# Altium PCB PCB1.PcbDoc (part 1 of 2)
Units mil, origin at the board's own origin, x right, y up, seen from the top; angles counter-clockwise.
Board outline 3553.34 x 3553.34 mil, 2 copper layers (Top Layer, Bottom Layer); 128 components, 103 nets, 393 pads, 82 vias.
Unrouted connection lines stored in the file: 8.
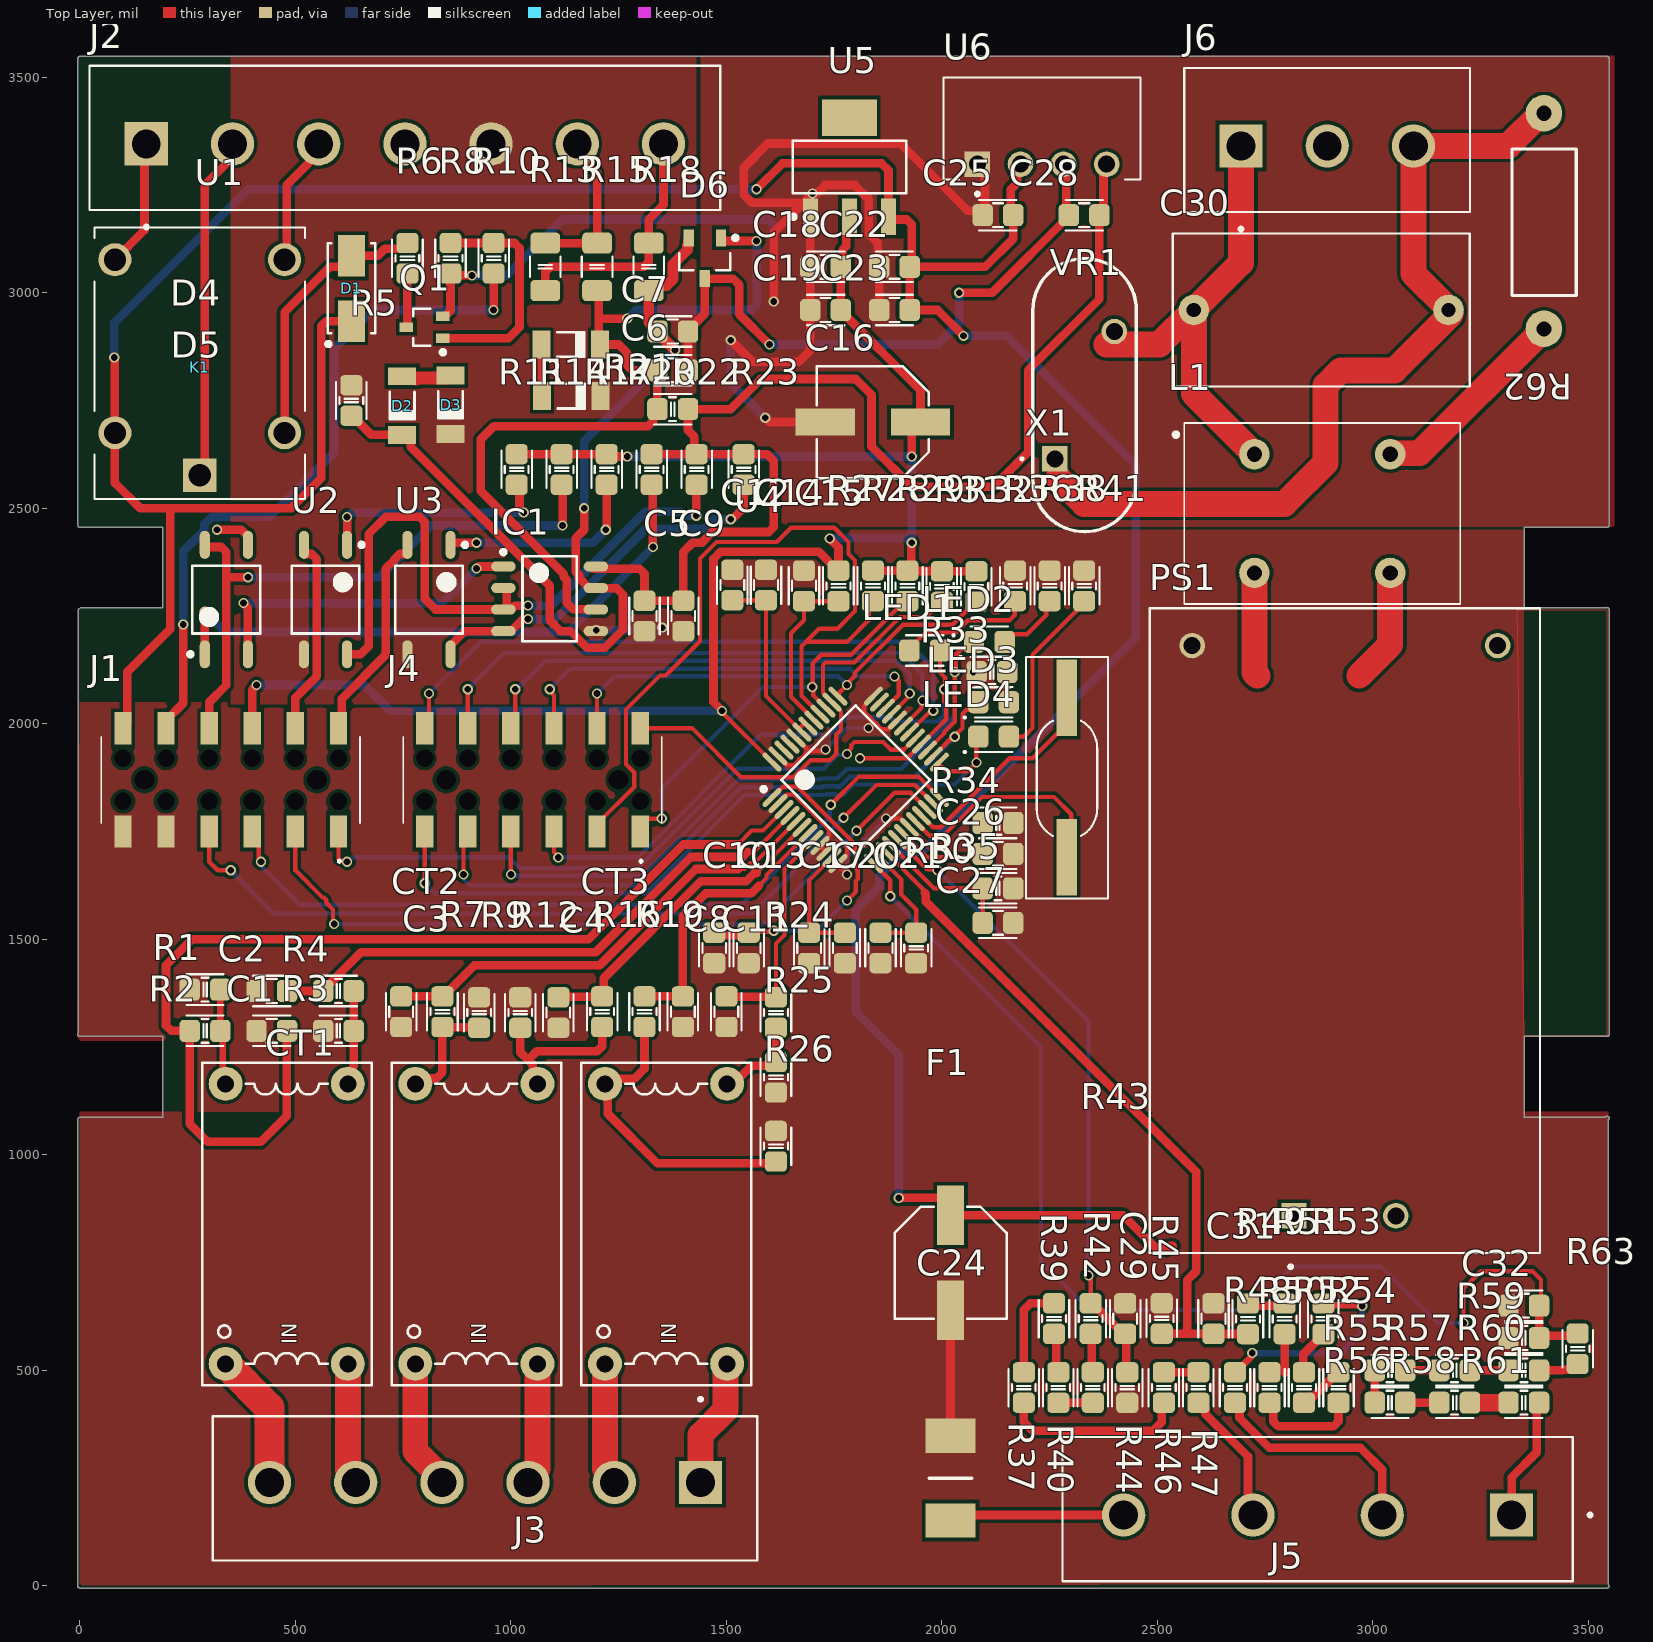
[diagram p0: Top Layer view]
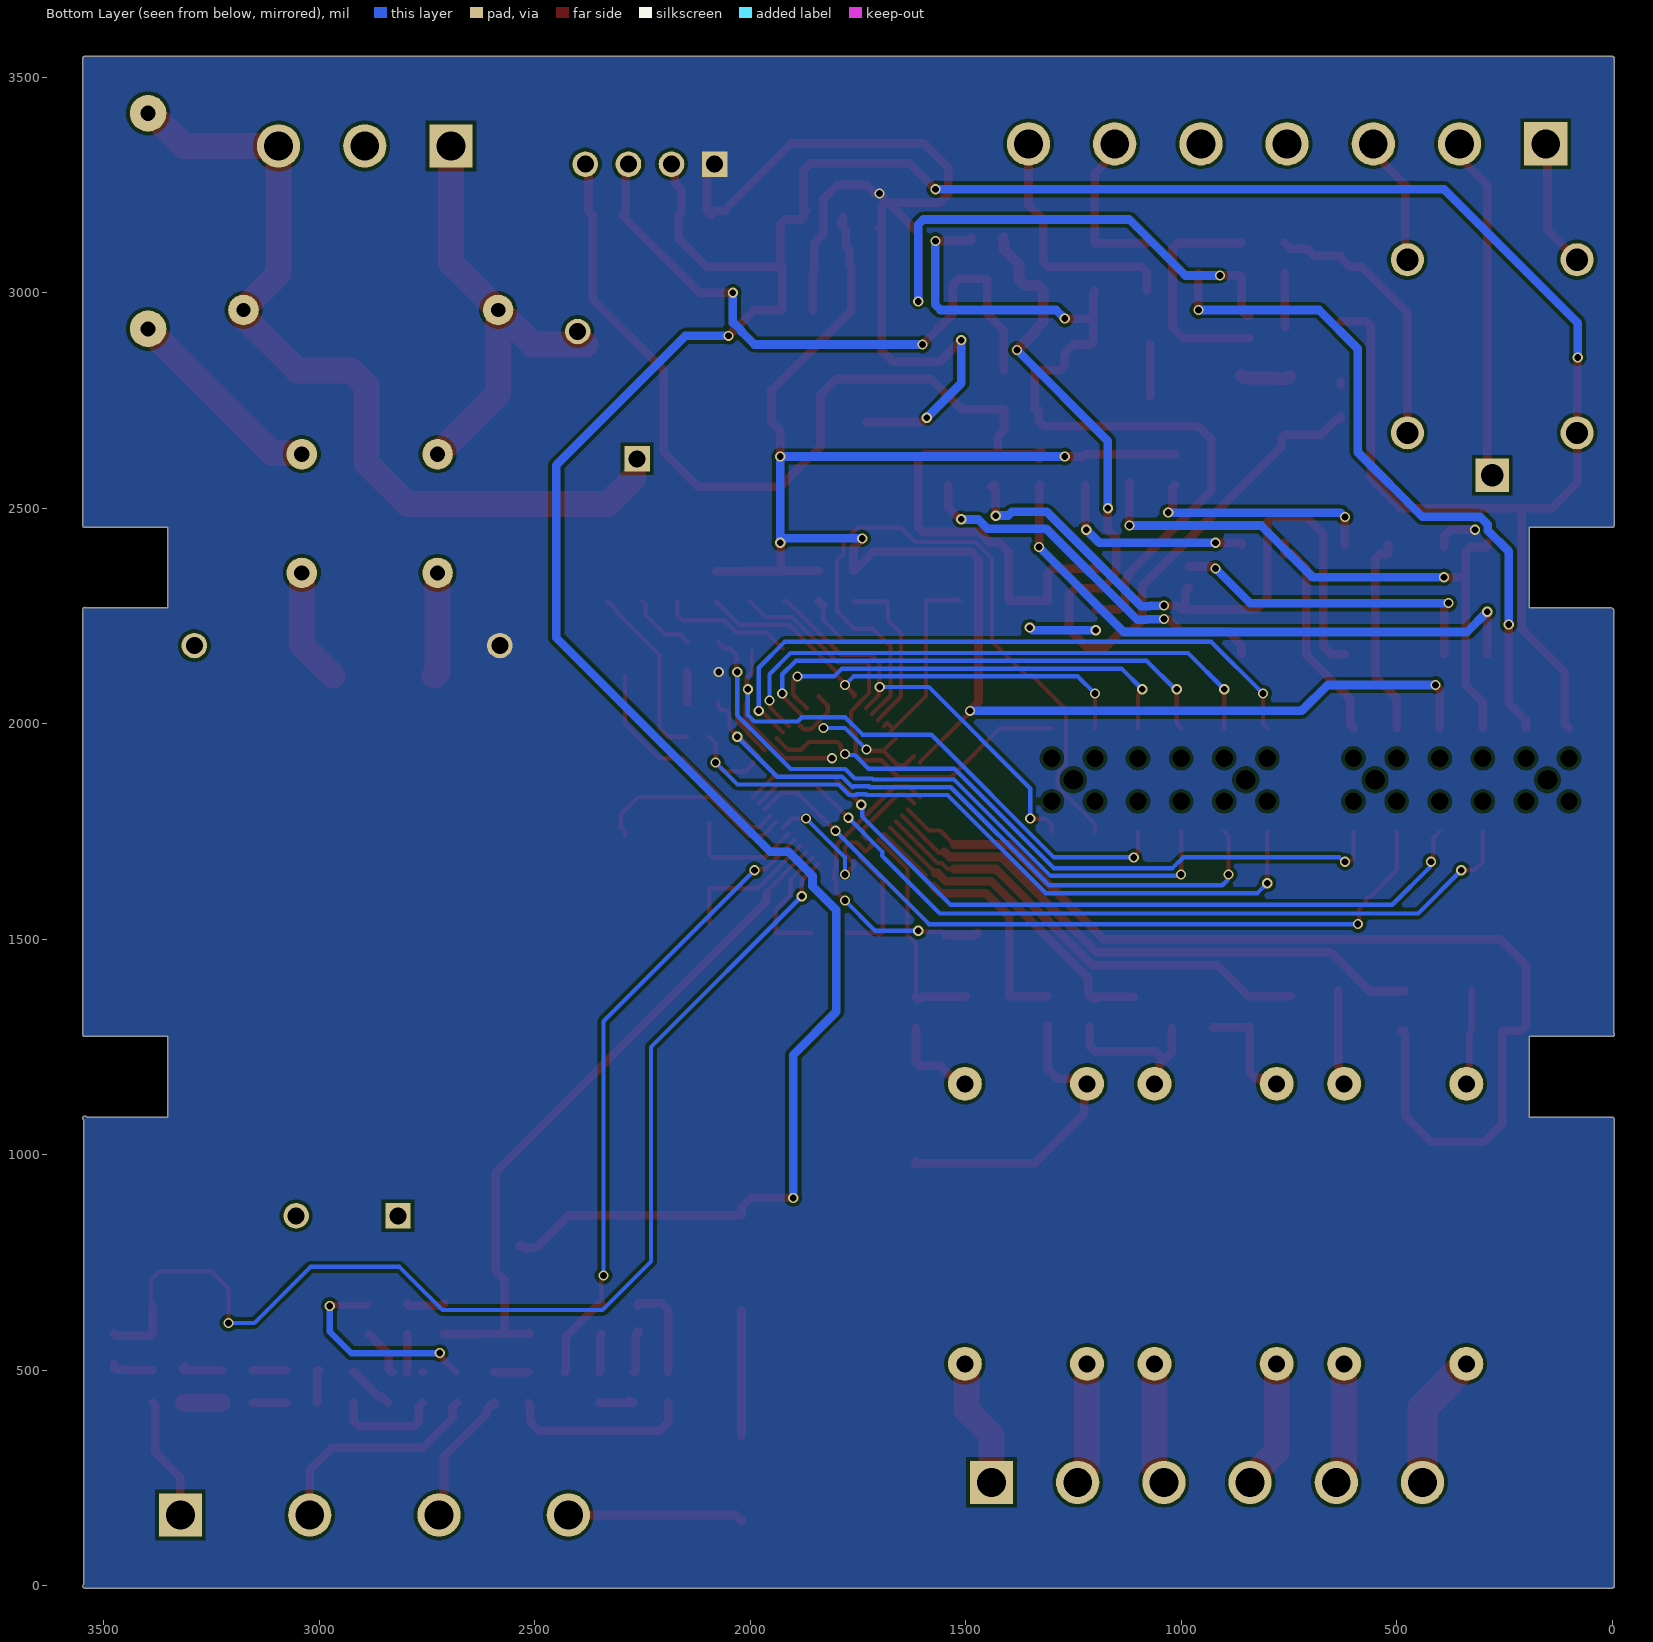
[diagram p1: Bottom Layer view, seen from below]
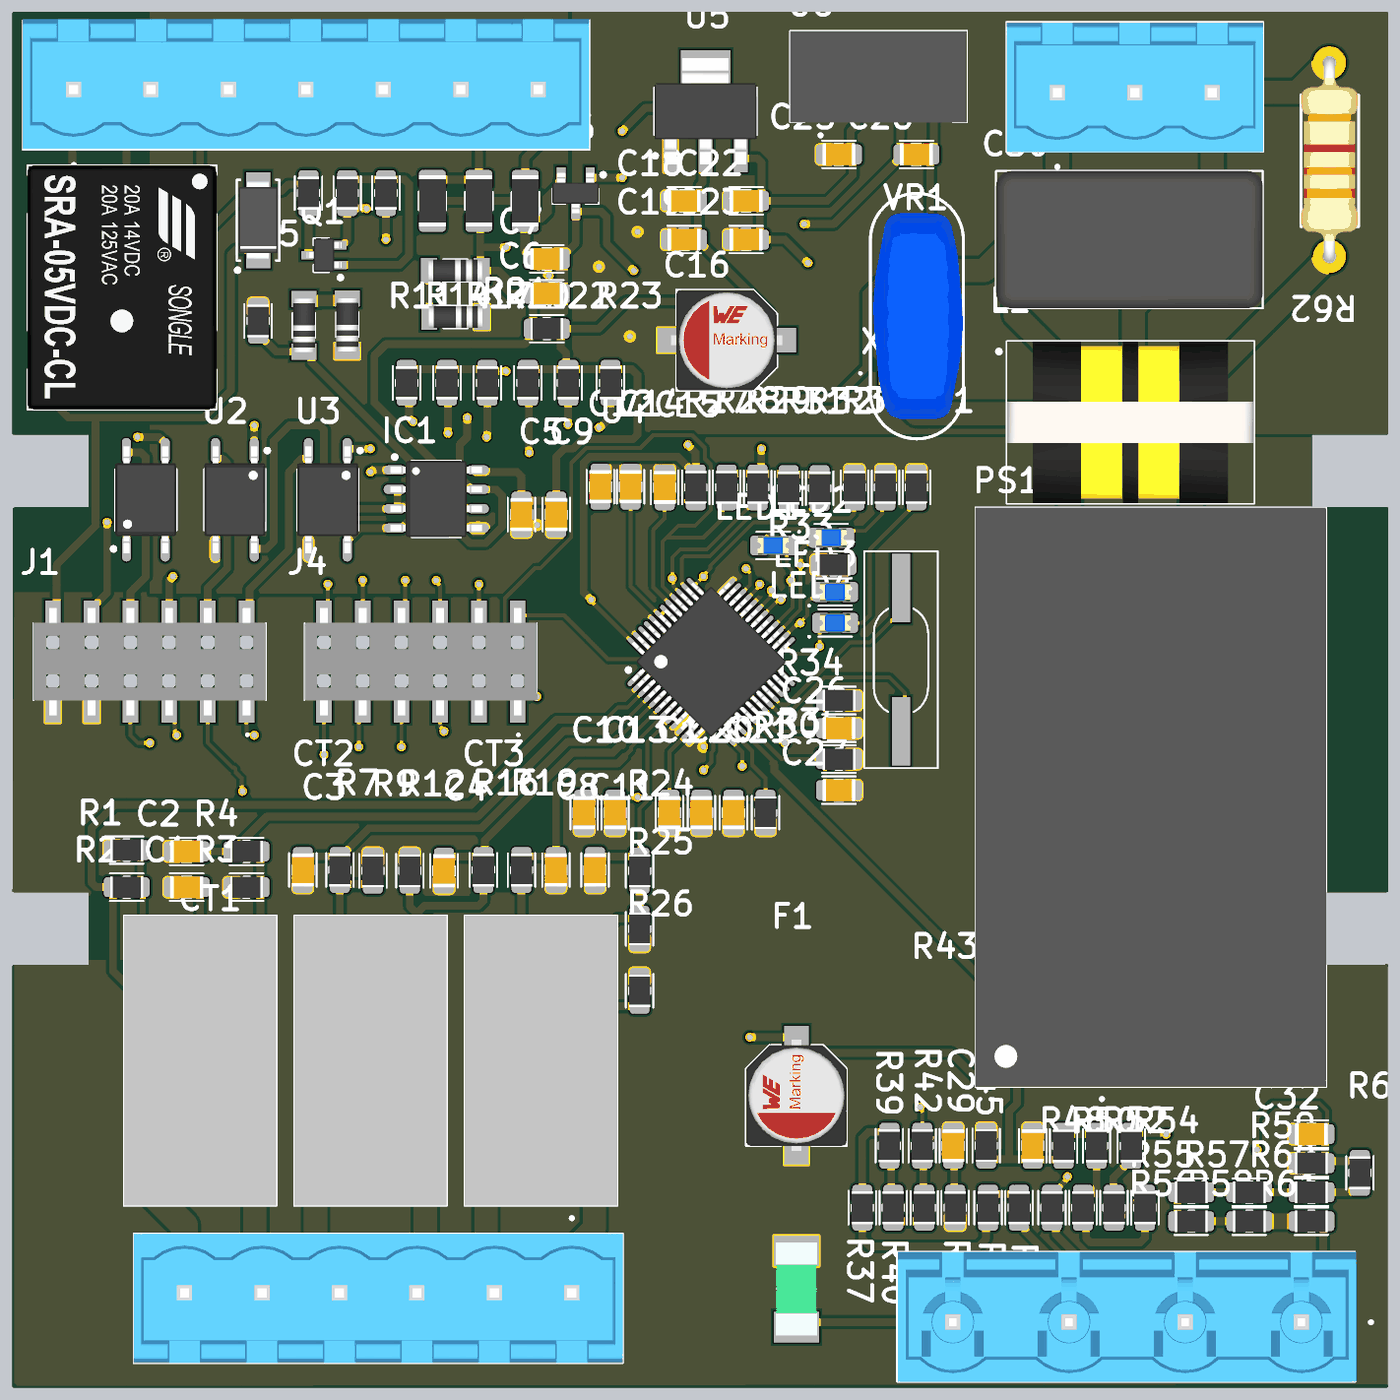
[diagram p3: 3D render of the assembled board from above, using the file's embedded part models]

## Layer stack, top to bottom
Top Solder: solder mask 0.4, Solder Resist, Dk 3.5
Top Layer: signal copper 1.4
Dielectric 1: dielectric 12.6, FR-4, Dk 4.8
Bottom Layer: signal copper 1.4
Bottom Solder: solder mask 0.4, Solder Resist, Dk 3.5

## Board outline
-5.01,0 -5.01,1082.19 cw(c0,1082.19) -0.21,1087.2 1.97,1087.69 191.84,1087.69 191.84,1274.51 0,1274.51 cw(c0,1279.53) -3.54,1283.08 -3.54,2260.63 cw(c0.98,2262.8) -2.56,2266.34 1.97,2268.79 191.84,2268.79 191.84,2455.61 0,2455.61 cw(c0,2460.63) -5.01,2460.63 -5.01,3543.31 cw(c0,3543.31) 0,3548.32 3543.31,3548.32 cw(c3543.31,3543.31) 3548.32,3543.31 3548.32,2460.63 cw(c3543.31,2460.63) 3543.31,2455.61 3351.47,2455.61 3351.47,2268.79 3540.32,2268.79 cw(c3543.31,2264.76) 3548.32,2264.76 3548.32,1279.53 cw(c3543.31,1279.53) 3543.31,1274.51 3351.47,1274.51 3351.47,1087.69 3539.26,1087.69 3539.76,1088.19 cw(c3543.31,1084.65) 3548.32,1084.65 3546.35,1080.6 3546.35,4.05 3548.32,0 cw(c3543.31,0) 3543.31,-5.01 0,-5.01 cw(c0,0)

## Design rules (kind name [scope] priority, off if disabled: settings)
Clearance [All] p1: gap=8 ignorepadtopadclearanceinfootprint=TRUE
MinimumSolderMaskSliver [All] p1: minsoldermaskwidth=5
PlaneConnect [All] p1: planeconnectstyle=Direct reliefexpansion=20 reliefentries=4 reliefconductorwidth=10 reliefairgap=10
PolygonConnect [All] p1: connectstyle=Direct reliefconductorwidth=10 reliefentries=4 polygonreliefangle="90 Angle" airgapwidth=10
RoutingVias small [All] p1: holewidth=11.81 width=19.68 viastyle="Through Hole" minholewidth=15.75 minwidth=23.62 maxholewidth=24.02 maxwidth=47.64
SilkToSilkClearance [All] p1: silktosilkclearance=5
SilkToSolderMaskClearance [IsPad] p1: minsilkscreentomaskgap=3 clearancetoexposedcopper=TRUE
SolderMaskExpansion [All] p1: expansion=4 istentingtop=FALSE
SupplyNets "Schematic Supply Nets_4" [InNet('+5V')] p1: voltage=0.000
SupplyNets "Schematic Supply Nets_3" [InNet('GND_RS485')] p2: voltage=0.000
SupplyNets "Schematic Supply Nets_2" [InNet('GND')] p3: voltage=0.000
SupplyNets "Schematic Supply Nets_1" [InNet('+5V_RS485')] p4: voltage=0.000
SupplyNets "Schematic Supply Nets" [InNet('+3.3V')] p5: voltage=0.000
Width [All] p1: maxlimit=70 minlimit=10 preferedwidth=10
26 further rules are at their usual default settings.

## Components (designator, comment, footprint, x,y, rotation, side; value= is the part's Value field where it differs from the comment)
C1 "18n/16V" CAP_C_2012X110 445.43,1287.58 r0 top (schematic designator C20)
C2 "18n/16V" CAP_C_2012X110 445.43,1380.01 r180 top (schematic designator C21)
C3 "18n/16V" CAP_C_2012X110 745.44,1332.09 r90 top (schematic designator C22)
C4 "18n/16V" CAP_C_2012X110 1110,1330 r270 top (schematic designator C24)
C5 "10u/6.3V" CAP_C_2012X110 1310,2250 r90 top (schematic designator C10)
C6 "0.1n/16V" CAP_C_2012X110 1375.43,2820 r180 top (schematic designator C12)
C7 "0.1n/16V" CAP_C_2012X110 1375.43,2910 r180 top (schematic designator C13)
C8 "18n/16V" CAP_C_2012X110 1399.04,1332.09 r90 top (schematic designator C25)
C9 "0.1u/6.3V" CAP_C_2012X110 1400,2250 r90 top (schematic designator C11)
C10 "0.1u/16V" CAP_C_2012X110 1471.81,1480 r90 top (schematic designator C15)
C11 "18n/16V" CAP_C_2012X110 1500,1332.09 r270 top (schematic designator C26)
C12 "0.1u/16V" CAP_C_2012X110 1513.81,2321.81 r270 top (schematic designator C16)
C13 "0.1u/16V" CAP_C_2012X110 1551.81,1480 r90 top (schematic designator C14)
C14 "10u/16V" CAP_C_2012X110 1591.81,2321.81 r270 top (schematic designator C17)
C15 "0.1u/16V" CAP_C_2012X110 1680,2320 r270 top (schematic designator C23)
C16 "100u/6.3V" CAP-ALU-SMD-6.3x7.7x2.2 1840,2700 r180 top (schematic designator C3)
C17 "4.7u/16V" CAP_C_2012X110 1692,1480 r90 top (schematic designator C19)
C18 "0.1u/6.3V" CAP_C_2012X110 1730,3060 r0 top (schematic designator C7)
C19 "10u/6.3V" CAP_C_2012X110 1730,2960 r0 top (schematic designator C6)
C20 "0.1u/16V" CAP_C_2012X110 1774.77,1480 r90 top (schematic designator C18)
C21 "18n/16V" CAP_C_2012X110 1857.54,1480 r90 top (schematic designator C28)
C22 "0.1u/6.3V" CAP_C_2012X110 1890,3060 r0 top (schematic designator C5)
C23 "10u/6.3V" CAP_C_2012X110 1890,2960 r0 top (schematic designator C4)
C24 "220u/6.3V" CAP-ALU-SMD-6.3x7.7x2.2 2020,749.76 r270 top (schematic designator C1)
C25 "4.7u/6.3V" CAP_C_2012X110 2130,3180 r0 top (schematic designator C8)
C26 "18n/16V" CAP_C_2012X110 2130,1698.19 r180 top (schematic designator C32)
C27 "18n/16V" CAP_C_2012X110 2130,1538.19 r180 top (schematic designator C30)
C28 "10u/6.3V" CAP_C_2012X110 2330,3180 r0 top (schematic designator C9)
C29 "18n/16V" CAP_C_2012X110 2425,620 r270 top (schematic designator C31)
C30 "0.1u/660V" CAPRR1500W60L1750T900H1600 2880,2960 r0 top (schematic designator C2)
C31 "18n/16V" CAP_C_2012X110 2630,620 r270 top (schematic designator C29)
C32 "18n/16V" CAP_C_2012X110 3350,650 r0 top (schematic designator C27)
CT1 "ZHT107(5A/2.5mA)" ZHT107 480,840 r90 top
CT2 "ZHT107(5A/2.5mA)" ZHT107 920,840 r90 top
CT3 "ZHT107(5A/2.5mA)" ZHT107 1360,840 r90 top
D1 "DR_1KV_1A" DIOM5025X26N 630,3010 r90 top value=1N5007
D2 "DZ_12V" LL-34 747.86,2738.19 r90 top (schematic designator D4)
D3 "DZ_7V" LL-34 860,2740 r90 top (schematic designator D6)
D4 "DZ_12V" LL-34 1139.23,2880 r180 top (schematic designator D3)
D5 "DZ_7V" LL-34 1140,2760 r180 top
D6 "SM712-02HTG" SOT95P237X112-3N 1450,3080 r270 top (schematic designator D2)
F1 "F_1A" FUSC6127X294N 2020,250 r90 top value=Fuse
IC1 "MAX485" SOIC-8 1090,2290 r0 top
J1 "SSM-106-S-DV" SSM-106-XXX-DV-BE 350,1870 r0 top (schematic designator J6)
J2 "TBP01R2-508-07BE" CUI_TBP01R2-508-07BE 154.13,3345.47 r0 top
J3 "TBP01R2-508-06BE" CUI_TBP01R2-508-06BE 1440,240 r180 top (schematic designator J1)
J4 "SSM-106-S-DV" SSM-106-XXX-DV-BE 1050,1870 r0 top (schematic designator J5)
J5 "TBP05R2-762-04BE" CUI_TBP05R2-762-04BE 3321.65,164.37 r180 top (schematic designator J3)
J6 "TBP01R2-508-03BE" CUI_TBP01R2-508-03BE 2893.9,3340.55 r0 top (schematic designator J4)
K1 "SRA-05VDC-CL" RELAY_SRA-05VDC-CL 278.15,2836.42 r90 top
L1 "10mH" UU98LFH142LF 2882.48,2487.8 r0 top
LED1 "LED" LED-0805-Blue 1960,2170 r180 top value="LED 3 - 5 ly 2 Colour" (schematic designator LED4)
LED2 "LED" LED-0805-Blue 2110,2190 r0 top value="LED 3 - 5 ly 2 Colour" (schematic designator LED3)
LED3 "LED" LED-0805-Blue 2120,2050 r0 top value="LED 3 - 5 ly 2 Colour" (schematic designator LED2)
LED4 "LED" LED-0805-Blue 2120,1970 r0 top value="LED 3 - 5 ly 2 Colour" (schematic designator LED1)
PS1 "HLK-5M05" CONV_HLK-5M05 2935,1520 r90 top
Q1 "BC817W" SOT-323 800,2920 r180 top
R1 "2.4R/1%" RES_C_2012X65 290.43,1383.37 r180 top (schematic designator R17)
R2 "1K/1%" RES_C_2012X65 290.43,1287.58 r180 top (schematic designator R16)
R3 "2.4R/1%" RES_C_2012X65 600,1287.58 r0 top (schematic designator R18)
R4 "1K/1%" RES_C_2012X65 600,1380.01 r180 top (schematic designator R19)
R5 "2K2/5%" RES_C_2012X65 630,2750 r270 top (schematic designator R15)
R6 "0R/1%" RES_C_2012X65 760,3080 r90 top (schematic designator R3)
R7 "1K/1%" RES_C_2012X65 841.23,1332.09 r90 top (schematic designator R21)
R8 "5.1K/1%" RES_C_2012X65 860,3080 r90 top (schematic designator R6)
R9 "2.4R/1%" RES_C_2012X65 926.4,1330 r90 top (schematic designator R26)
R10 "1K/1%" RES_C_2012X65 960,3080 r90 top (schematic designator R5)
R11 "330R/1%" RES_C_2012X65 1013.45,2590 r270 top (schematic designator R7)
R12 "2.4R/1%" RES_C_2012X65 1021.81,1330 r270 top (schematic designator R27)
R13 "120R/1%" RES_C_3216X70 1080,3060 r90 top
R14 "330R/1%" RES_C_2012X65 1117.85,2590 r270 top (schematic designator R2)
R15 "10R/1%" RES_C_3216X70 1200,3060 r90 top (schematic designator R12)
R16 "1K/1%" RES_C_2012X65 1211.81,1332.09 r90 top (schematic designator R29)
R17 "330R/1%" RES_C_2012X65 1222.25,2590 r270 top (schematic designator R9)
R18 "10R/1%" RES_C_3216X70 1320,3060 r90 top (schematic designator R14)
R19 "1K/1%" RES_C_2012X65 1310,1332.09 r90 top (schematic designator R30)
R20 "560R/5%" RES_C_2012X65 1326.65,2590 r90 top (schematic designator R4)
R21 "2K2/5%" RES_C_2012X65 1375.43,2730 r0 top (schematic designator R11)
R22 "560R/5%" RES_C_2012X65 1431.05,2590 r90 top (schematic designator R8)
R23 "560R/5%" RES_C_2012X65 1540,2590 r90 top (schematic designator R10)
R24 "1K/1%" RES_C_2012X65 1615,1330 r90 top (schematic designator R36)
R25 "2.4R/1%" RES_C_2012X65 1615,1180 r90 top (schematic designator R34)
R26 "2.4R/1%" RES_C_2012X65 1615,1020 r90 top (schematic designator R32)
R27 "5.1K/1%" RES_C_2012X65 1760,2320 r90 top (schematic designator R20)
R28 "5.1K/1%" RES_C_2012X65 1840,2320 r90 top (schematic designator R24)
R29 "5.1K/1%" RES_C_2012X65 1920,2320 r90 top (schematic designator R25)
R30 "1K/1%" RES_C_2012X65 1940.31,1480 r270 top (schematic designator R45)
R31 "5.1K/1%" RES_C_2012X65 2000,2318.19 r90 top (schematic designator R23)
R32 "5.1K/1%" RES_C_2012X65 2080,2318.19 r90 top (schematic designator R22)
R33 "750R/1%" RES_C_2012X65 2116.06,2120 r180 top (schematic designator R31)
R34 "1K/1%" RES_C_2012X65 2130,1770 r0 top (schematic designator R63)
R35 "1K/1%" RES_C_2012X65 2130,1618.19 r0 top (schematic designator R54)
R36 "750R/1%" RES_C_2012X65 2170,2320 r90 top (schematic designator R35)
R37 "240K/1%" RES_C_2012X65 2190,460 r270 top (schematic designator R57)
R38 "750R/1%" RES_C_2012X65 2250,2320 r90 top (schematic designator R33)
R39 "240K/1%" RES_C_2012X65 2260,620 r90 top (schematic designator R58)
R40 "240K/1%" RES_C_2012X65 2270,460 r90 top (schematic designator R59)
R41 "750R/1%" RES_C_2012X65 2330,2320 r90 top (schematic designator R28)
R42 "240K/1%" RES_C_2012X65 2345,620 r270 top (schematic designator R61)
R43 "240K/1%" RES_C_2012X65 2350,460 r270 top (schematic designator R60)
R44 "1K/1%" RES_C_2012X65 2429.99,460 r270 top (schematic designator R62)
R45 "1K/1%" RES_C_2012X65 2510.01,620.43 r90 top (schematic designator R53)
R46 "240K/1%" RES_C_2012X65 2515,460 r90 top (schematic designator R56)
R47 "240K/1%" RES_C_2012X65 2595,460 r270 top (schematic designator R55)
R48 "240K/1%" RES_C_2012X65 2680,460 r270 top (schematic designator R46)
R49 "240K/1%" RES_C_2012X65 2710.01,619.57 r90 top (schematic designator R52)
R50 "240K/1%" RES_C_2012X65 2759.99,460 r270 top
R51 "240K/1%" RES_C_2012X65 2795.01,619.57 r270 top
R52 "240K/1%" RES_C_2012X65 2840,460 r90 top (schematic designator R48)
R53 "240K/1%" RES_C_2012X65 2885.01,619.57 r90 top (schematic designator R47)
R54 "240K/1%" RES_C_2012X65 2920.01,460 r90 top (schematic designator R49)
R55 "240K/1%" RES_C_2012X65 3039.57,500.01 r180 top (schematic designator R40)
R56 "240K/1%" RES_C_2012X65 3039.57,424.99 r0 top (schematic designator R39)
R57 "240K/1%" RES_C_2012X65 3189.57,500.01 r180 top (schematic designator R41)
R58 "240K/1%" RES_C_2012X65 3189.57,424.99 r0 top (schematic designator R38)
R59 "1K/1%" RES_C_2012X65 3350,575 r180 top (schematic designator R44)
R60 "240K/1%" RES_C_2012X65 3350,500 r180 top (schematic designator R42)
R61 "240K/1%" RES_C_2012X65 3350,425 r0 top (schematic designator R37)
R62 "6R8/5%/1W" RES-1W 3396.65,3166.34 r270 top (schematic designator R1)
R63 "240K/1%" RES_C_2012X65 3475,550 r270 top (schematic designator R43)
U1 "TLP185" SOP254P700X220-4N 340,2288.19 r90 top value=PC817 (schematic designator U3)
U2 "TLP185" SOP254P700X220-4N 570,2288.19 r270 top value=PC817 (schematic designator U4)
U3 "TLP185" SOP254P700X220-4N 810,2288.19 r270 top value=PC817 (schematic designator U5)
U4 "ATM90E32AS-AU-R" TSQFP50P900X900X120-48N 1800,1870 r45 top (schematic designator U6)
U5 "LM1117-3.3V" SOT230P700X180-4N 1785.43,3291.34 r90 top (schematic designator U1)
U6 "B0505S" B0505S-1W 2232.28,3380.91 r0 top (schematic designator U2)
VR1 "470V/4.5KA" B72214P2301K101 2262.2,2614.72 r90 top
X1 "16.384Mhz" XT2-SMD 2290,1880 r90 top value=4Mhz

## Footprints (in the part's own frame and the unit in brackets; to place one, negate y for a bottom-side part, rotate by r counter-clockwise, add the part's x,y. Pads: shape width x height; smd on the part's side, far side on the other; paste and mask are expansions set on the pad)
B0505S-1W [mm]
  rect 1.508x1.508 / inner round 1.508 / far side rect 1.508x1.508 hole 1: 1(-3.81,-2.1)
  round 1.508 hole 1: 2(-1.27,-2.1) 3(1.27,-2.1) 4(3.81,-2.1)
  silkscreen extent -5.8,-3.95 5.8,3, body extent -5.8,-3.01 5.8,2.99, height 10.16
B72214P2301K101 [mm]
  rect 1.5x1.5 hole 1: 1(0,0)
  round 1.5 hole 1: 2(7.5,-3.5)
  silkscreen extent -4.3,-4.8 11.8,2, body extent -3,-4.77 10.5,1.11, height 17.97
CAP-ALU-SMD-6.3x7.7x2.2 [mm]
  rect 3.5x1.6 smd: 1(-2.8,0) 2(2.8,0)
  silkscreen extent -3.3,-3.3 3.3,3.3, body extent -3.65,-3.3 3.65,3.3, height 7.65
CAP_C_2012X110 [mm]
  rrect41% 1.2x1.3 smd: 1(-0.9,0) 2(0.9,0)
  silkscreen extent -1.1,-0.9 1.1,0.9, body extent -1.1,-0.72 1.1,0.72, height 1.1
CAPRR1500W60L1750T900H1600 [mm]
  round 1.8 hole 0.85: 1(-7.5,0)
  round 1.8 / inner round 1.2 / far side round 1.8 hole 0.85: 2(7.5,0)
  silkscreen extent -8.75,-4.5 8.75,4.5, body extent -8.75,-4.5 8.75,4.5, height 16
CONV_HLK-5M05 [mm]
  rect 1.5x1.5 / inner round 1.5 / far side rect 1.5x1.5 hole 1: 1(-16.8,3)
  round 1.5 hole 1: 2(-16.8,-3) 3(16.8,9) 4(16.8,-9)
  silkscreen extent -19.9,-11.5 19,11.5, body extent -19,-11.5 19,11.5, height 18
CUI_TBP01R2-508-03BE [mm]
  rect 2.55x2.55 / inner round 2.55 / far side rect 2.55x2.55 hole 1.7: 1(-5.08,0)
  round 2.55 hole 1.7: 2(0,0) 3(5.08,0)
  silkscreen extent -8.42,-5 8.42,4.6, body extent -8.42,-3.93 8.42,4.57, height 12.1
CUI_TBP01R2-508-06BE [mm]
  rect 2.55x2.55 / inner round 2.55 / far side rect 2.55x2.55 hole 1.7: 1(0,0)
  round 2.55 hole 1.7: 2(5.08,0) 3(10.16,0) 4(15.24,0) 5(20.32,0) 6(25.4,0)
  silkscreen extent -3.34,-5 28.74,4.6, body extent -3.34,-3.9 28.74,4.6, height 12.1
CUI_TBP01R2-508-07BE [mm]
  rect 2.55x2.55 / inner round 2.55 / far side rect 2.55x2.55 hole 1.7: 1(0,0)
  round 2.55 hole 1.7: 2(5.08,0) 3(10.16,0) 4(15.24,0) 5(20.32,0) 6(25.4,0) 7(30.48,0)
  silkscreen extent -3.34,-5 33.82,4.6, body extent -3.36,-3.85 33.8,4.65, height 12.1
CUI_TBP05R2-762-04BE [mm]
  rect 2.55x2.55 / inner round 2.55 / far side rect 2.55x2.55 hole 1.7: 1(0,0)
  round 2.55 hole 1.7: 2(7.62,0) 3(15.24,0) 4(22.86,0)
  silkscreen extent -4.72,-4.6 26.46,3.9, body extent -3.66,-4.6 26.4,3.9, height 12
DIOM5025X26N [mm]
  rect 2.45x1.6 smd: 1(1.925,0) 2(-1.925,0)
  silkscreen extent -3.4,-1.4 2.65,1.47, body extent -2.57,-1.28 2.57,1.28, height 2.5
FUSC6127X294N [mm]
  rect 2.02x2.95 smd: 1(-2.5,0) 2(2.5,0)
  silkscreen extent 0,-1.24 0,1.24, body extent -3.05,-1.35 3.05,1.35, height 2.94
LED-0805-Blue [mm]
  rrect41% 1.2x1.3 smd: 1(-0.9,0) 2(0.9,0)
  silkscreen extent -1.75,-0.95 1.1,0.9, body extent -1.01,-0.63 1.01,0.63, height 1.1
LL-34 [mm]
  rect 1.05x1.65 smd: 1(-1.725,0) 2(1.725,0)
  silkscreen extent -0.8,-0.73 0.8,0.72, body extent -1.75,-0.72 1.75,0.72, height 1.45
RELAY_SRA-05VDC-CL [mm]
  round 1.95 hole 1.3: COIL1(-4.1,5) COIL2(-4.1,-5) NC(6.1,5) NO(6.1,-5)
  rect 1.95x1.95 / inner round 1.95 / far side rect 1.95x1.95 hole 1.3: COM(-6.6,0)
  silkscreen extent -8,-6.2 8,6.2, body extent -8,-6.2 8,6.2, height 14
RES-1W [mil]
  round 85 hole 35: 1(-250,0) 2(250,0)
  silkscreen extent -167,-74 173,75, body extent -265,-74 265,74, height 189
RES_C_2012X65 [mm]
  rrect41% 1.2x1.3 smd: 1(-0.9,0) 2(0.9,0)
  silkscreen extent -1.1,-0.9 1.1,0.9, body extent -1.07,-0.7 1.07,0.7, height 0.65
RES_C_3216X70 [mm] "Chip Resistor, 2-Leads, Body 3.20x1.60mm, IPC Medium Density"
  rrect39% 1.25x1.75 smd: 1(-1.4,0) 2(1.4,0)
  silkscreen extent -0.6,-0.9 0.6,0.9, body extent -1.68,-0.87 1.68,0.87, height 0.71
SOIC-8 [mm]
  oval 1.45x0.6 smd: 1(-2.725,1.905) 2(-2.725,0.635) 3(-2.725,-0.635) 4(-2.725,-1.905) 5(2.725,-1.905) 6(2.725,-0.635) 7(2.725,0.635) 8(2.725,1.905)
  silkscreen extent -2.85,-2.5 1.6,2.88, body extent -3,-2.5 3,2.5, height 1.75
SOP254P700X220-4N [mm]
  oval 1.65x0.6 smd: 1(-3.225,1.27) 2(-3.225,-1.27) 3(3.225,-1.27) 4(3.225,1.27)
  silkscreen extent -3.35,-2 2,2.24, body extent -3.5,-2 3.5,2, height 2.2
SOT95P237X112-3N [mm]
  rect 1x0.6 smd: 1(-1.2,0.95) 2(-1.2,-0.95) 3(1.2,0)
  silkscreen extent -1.32,-1.5 0.7,1.93, body extent -1.32,-1.52 1.32,1.52, height 1.12
SOT230P700X180-4N [mm]
  rect 2.15x0.9 smd: 1(-2.925,2.3) 2(-2.925,0) 3(-2.925,-2.3)
  rect 2.15x3.25 smd: 4(2.925,0)
  silkscreen extent -3.05,-3.35 1.55,3.42, body extent -3.5,-3.35 3.5,3.35, height 1.8
SOT-323 [mm]
  rect 0.8x0.55 smd: 1(-1.075,0.65) 2(-1.075,-0.65) 3(1.075,0)
  silkscreen extent -1.2,-1.1 0.67,1.6, body extent -1.15,-1.1 1.15,1.1, height 1.1
SSM-106-XXX-DV-BE [mm]
  rect 1.02x1.905 smd: 1(6.35,-3.047) 2(6.35,3.047) 3(3.81,-3.047) 4(3.81,3.047) 5(1.27,-3.047) 6(1.27,3.047) 7(-1.27,-3.047) 8(-1.27,3.047) 9(-3.81,-3.047) 10(-3.81,3.047) 11(-6.35,-3.047) 12(-6.35,3.047)
  round 0.585 hole 1.17 unplated: 13(5.08,0) 14(-5.08,0)
  round 0.51 hole 1.02 unplated: 13(6.35,-1.27) 14(6.35,1.27) 15(3.81,-1.27) 16(3.81,1.27) 17(1.27,-1.27) 18(1.27,1.27) 19(-1.27,-1.27) 20(-1.27,1.27) 21(-3.81,-1.27) 22(-3.81,1.27) 23(-6.35,-1.27) 24(-6.35,1.27)
  silkscreen extent -7.62,-4.85 7.62,2.54, body extent -7.62,-3.52 7.62,3.52, height 7.5
TSQFP50P900X900X120-48N [mm]
  oval 1.45x0.3 smd: 1(-4.225,2.75) 2(-4.225,2.25) 3(-4.225,1.75) 4(-4.225,1.25) 5(-4.225,0.75) 6(-4.225,0.25) 7(-4.225,-0.25) 8(-4.225,-0.75) 9(-4.225,-1.25) 10(-4.225,-1.75) 11(-4.225,-2.25) 12(-4.225,-2.75) 25(4.225,-2.75) 26(4.225,-2.25) 27(4.225,-1.75) 28(4.225,-1.25) 29(4.225,-0.75) 30(4.225,-0.25) 31(4.225,0.25) 32(4.225,0.75) 33(4.225,1.25) 34(4.225,1.75) 35(4.225,2.25) 36(4.225,2.75)
  oval 0.3x1.45 smd: 13(-2.75,-4.225) 14(-2.25,-4.225) 15(-1.75,-4.225) 16(-1.25,-4.225) 17(-0.75,-4.225) 18(-0.25,-4.225) 19(0.25,-4.225) 20(0.75,-4.225) 21(1.25,-4.225) 22(1.75,-4.225) 23(2.25,-4.225) 24(2.75,-4.225) 37(2.75,4.225) 38(2.25,4.225) 39(1.75,4.225) 40(1.25,4.225) 41(0.75,4.225) 42(0.25,4.225) 43(-0.25,4.225) 44(-0.75,4.225) 45(-1.25,4.225) 46(-1.75,4.225) 47(-2.25,4.225) 48(-2.75,4.225)
  silkscreen extent -4.35,-3.1 3.1,3.57, body extent -4.5,-4.5 4.5,4.5, height 1.2
UU98LFH142LF [mm]
  round 1.8 hole 0.9: 1(-4,3.5) 2(-4,-3.5) 3(4,-3.5) 4(4,3.5)
  silkscreen extent -8.75,-5.33 8.13,5.33, body extent -8.08,-5.3 8.08,5.3, height 15.3
XT2-SMD [mm]
  rect 4.5x1.2 smd: 1(-4.826,0) 2(4.572,0)
  silkscreen extent -7.24,-2.41 6.99,2.41, body extent -6.53,-2.41 6.27,2.42, height 4.3
ZHT107 [mm]
  round 2 hole 1: 1(-8.25,3.6) 2(-8.25,-3.6) 3(8.25,3.6) 4(8.25,-3.6)
  silkscreen extent -9.51,-5.01 9.49,4.99, body extent -9.5,-5 9.5,5, height 18.5

## Part data
C1 C2 C3 C4 C5 C6 C7 C8 C9 C10 C11 C12 C13 C14 C15 C17 C18 C19 C20 C21 C22 C23 C25 C26 C27 C28 C29 C30 C31 C32: library part CAP_SMD
C16 C24: library part CAP_POLAR
CT1 CT2 CT3: library part ZHT-107, "C5183046"
D1: library part Diode, "Default Diode", Code - JEDEC=DO-214-AB, Published=8-Jun-2000, Publisher="Altium Limited", Revision="July-2002: Re-released for DXP Platform."
D2 D3 D4 D5: library part "DIODE Zener", "Zenner"
D6: "TVS Diode, SM712 Series, 31V Clamp, 600W Peak Pulse, Surface Mount, SOT23-3", Package="SOT-23 Littelfuse Inc.", Check_prices=https://www.snapeda.com/parts/SM712-02HTG/Littelfuse/view-part/?ref=eda, MF="Littelfuse Inc.", MP=SM712-02HTG, SnapEDA_Link=https://www.snapeda.com/parts/SM712-02HTG/Littelfuse/view-part/?ref=snap
F1: library part Fuse, "Fuse", Designed by=VanDungEvn
IC1: "RS232 - RS485 (Same sn75176)"
J1 J4: "Connector", Arrow Part Number=SSM-105-S-DV, Manufacturer_Name=SAMTEC, Mouser Part Number=200-SSM105SDV, Arrow Price/Stock=https://www.arrow.com/en/products/ssm-105-s-dv/samtec, Datasheet Link=https://mm.digikey.com/Volume0/opasdata/d220001/medias/docus/6129/ssm-1xx-xxx-dv-xx-xx-xxx-x-xx-mkt.pdf, Manufacturer_Part_Number=SSM-105-S-DV, Mouser Price/Stock=https://www.mouser.co.uk/ProductDetail/Samtec/SSM-105-S-DV?qs=XtX6y9BSeMiNY1vJI%2FFCQQ%3D%3D
J2 J6: "2~24 Poles, Pluggable, Receptacle, Vertical, 5.08 Pitch, Terminal Block Connector", Package=None, MF="Same Sky"
  J2: Check_prices=https://www.snapeda.com/parts/TBP01R2-508-07BE/Same+Sky/view-part/?ref=eda, MP=TBP01R2-508-07BE, SnapEDA_Link=https://www.snapeda.com/parts/TBP01R2-508-07BE/Same+Sky/view-part/?ref=snap
  J6: Check_prices=https://www.snapeda.com/parts/TBP01R2-508-03BE/Same+Sky/view-part/?ref=eda, MP=TBP01R2-508-03BE, SnapEDA_Link=https://www.snapeda.com/parts/TBP01R2-508-03BE/Same+Sky/view-part/?ref=snap
J3: "2~24 Ð¿Ð¾Ð»ÑŽÑÐ°, Ð¿Ð¾Ð´ÐºÐ»ÑŽÑ‡Ð°ÐµÐ¼Ñ‹Ð¹, Ð²ÐµÑ€Ñ‚Ð¸ÐºÐ°Ð»ÑŒÐ½Ñ‹Ð¹, ÑˆÐ°Ð³ 5,08, ÐºÐ»ÐµÐ¼Ð¼Ð½Ñ‹Ð¹ Ð±Ð»Ð¾Ðº", Package=None, Check_prices=https://www.snapeda.com/parts/TBP01R2-508-06BE/Same+Sky/view-part/?ref=eda, MF="Same Sky", MP=TBP01R2-508-06BE, SnapEDA_Link=https://www.snapeda.com/parts/TBP01R2-508-06BE/Same+Sky/view-part/?ref=snap
J5: "2~24 Poles, Pluggable, Receptacle, Vertical, 7.62 Pitch, Terminal Block Connector", Package=None, Check_prices=https://www.snapeda.com/parts/TBP05R2-762-04BE/Same+Sky/view-part/?ref=eda, MF="Same Sky", MP=TBP05R2-762-04BE, SnapEDA_Link=https://www.snapeda.com/parts/TBP05R2-762-04BE/Same+Sky/view-part/?ref=snap
K1: Package=Package, Check_prices=https://www.snapeda.com/parts/SRA-05VDC-CL/Songle+Relay/view-part/?ref=eda, MF="Songle Relay", MP=SRA-05VDC-CL, SnapEDA_Link=https://www.snapeda.com/parts/SRA-05VDC-CL/Songle+Relay/view-part/?ref=snap
L1: library part L-DIP-2, Manufacturer="Würth Elektronik eiSos GmbH", PartNo=744284100, ComponentLink1Description=Manufacturer, ComponentLink1URL=http://www.we-online.de, ComponentLink2Description=Datasheet, ComponentLink2URL=http://www.we-online.de/katalog/media/pdf/744284100.pdf, Created by="Christin Zierenner", Created Date="March 2012", Inductance=10mH
LED1 LED2 LED3 LED4: library part "LED SMD"
PS1: "AC DC 220V to 5V 5W 5Watt Isolated Switching Step-Down Power Supply Module Converter", Package=Package, Availability="Not in stock", Check_prices=https://www.snapeda.com/parts/HLK-5M05/Hi-link/view-part/?ref=eda, MF=Hi-link, MP=HLK-5M05, Price=None, SnapEDA_Link=https://www.snapeda.com/parts/HLK-5M05/Hi-link/view-part/?ref=snap
Q1: library part BJT_NPN
R1 R2 R3 R4 R5 R6 R7 R8 R9 R10 R11 R12 R13 R14 R15 R16 R17 R18 R19 R20 R21 R22 R23 R24 R25 R26 R27 R28 R29 R30 R31 R32 R33 R34 R35 R36 R37 R38 R39 R40 R41 R42 R43 R44 R45 R46 R47 R48 R49 R50 R51 R52 R53 R54 R55 R56 R57 R58 R59 R60 R61 R62 R63: library part Res-SMD, "Resistor", Manufacturer="Generic Components", Class=Passive, Published=08/06/2000, Publisher="Altium Hobart Technology Centre"
U1 U2 U3: "Single Opto"
U4: "IC ENERGY METER 1.8V/3V 48TQFP", Package="TQFP-48 Microchip", Availability=Warning, MF=Microchip, MP=ATM90E32AS-AU-R, Price=None, Purchase-URL=https://pricing.snapeda.com/search/part/ATM90E32AS-AU-R/?ref=eda, SnapEDA_Link=https://www.snapeda.com/parts/ATM90E32AS-AU-R/Microchip/view-part/592639/?ref=snap
U5: library part LM1117, "800mA Low-Dropout Linear Regulator", Creator="Nguyen Ba Bien", Website=http://group3i.net
VR1: library part Varistor, "MOV-14D471K, Varistors 470V 14mm"
X1: library part XT2, "Crystal, 32.768 KHz, -40 to 85 degC, 3.2 x 1.5 x 0.9 mm SMD"

## Via types
v1: diameter 23.62, hole 15.75, Top Layer to Bottom Layer, 82 vias

## Nets (pads, with @x,y where several pads share a name; then routed paths per layer and width w, separated by ;. In a path a pad name is that pad's centre, name@x,y a point inside that pad or via, vN(x,y) a via of type N, cw(c..) or ccw(c..) an arc to the next point about the centre after c; other vN are vias at no path point)
+3.3V: C10.2 C13.2 C16.1 C18.2 C19.2 J1.6 R11.1 R14.1 R17.1 R27.2 R28.2 R29.2 R31.2 R32.2 U4.1 U4.48 U5.2 | length 5154.9
  Top Layer w10: v1(1490,2030) 1490,2026.89 U4.48@1605.82,1911.06 ; C13.2@1546.37,1510 1554.09,1517.72 1607.72,1517.72 v1(1610,1520) ; U4.1@1605.82,1828.94 1606.31,1828.94 1631.39,1854.01 1664.96,1854.01 1761.75,1757.22 1797.93,1721.04 1797.93,1712.07 1800,1710 1800,1665.09 1804.81,1660.28 1804.81,1639.72 1800,1634.91 1800,1610 v1(1780,1590)
  Top Layer w20: J1.6@400,1989.98 400,2079.02 410,2089.02 v1(410,2090) ; R11.1@1013.46,2625.43 R14.1@1117.86,2625.43 R17.1@1222.26,2625.43 1227.69,2620 v1(1270,2620) ; C10.2@1471.8,1515.43 1477.24,1510 C13.2@1546.37,1510 ; v1(1490,2030) 1490,2030.98 1470.23,2050.75 1470.23,2382.56 1486.54,2398.87 1714.59,2398.87 1758.03,2355.43 R27.2@1759.99,2355.43 1759.99,2409.06 1740,2429.05 v1(1740,2430) ; U5.2@1785.43,3176.18 1785.43,3164.57 1790,3160 1777.72,3147.72 1777.72,3107.72 1770,3100 1770,3064.57 C18.2@1765.43,3060.01 C19.2@1765.43,2960.01 1765.43,2958.04 1950.24,2773.23 C16.1@1950.24,2700 1930,2679.76 v1(1930,2620) ; R28.2@1839.99,2355.43 R29.2@1919.99,2355.43 ; v1(1930,2420) 1929.31,2419.31 1929.31,2364.75 R29.2@1919.99,2355.43 ; R32.2@2079.99,2353.62 R31.2@1999.99,2353.62 1999.09,2354.53 1920.9,2354.53 R29.2@1919.99,2355.43
  Bottom Layer w10: v1(1610,1520) 1710,1520 v1(1780,1590)
  Bottom Layer w20: v1(410,2090) 660,2090 720,2030 v1(1490,2030) ; v1(1270,2620) v1(1930,2620) v1(1930,2420) 1929.02,2420 1919.02,2430 v1(1740,2430)
+5V: C22.2 C23.2 C24.1 C25.2 D1.2 J1.12 K1.COIL1 PS1.4 U5.3 U6.2 | length 8081.5
  Top Layer w15: 2495.67,784.33 2495.67,788.58
  Top Layer w20: v1(80,2850) 80.65,2849.35 80.65,2675.65 K1.COIL1@81.3,2675 81.3,2558.7 140,2500 210,2500 ; J1.12@100,1989.98 110,1999.98 110,2120 210,2220 210,2500 ; D1.2@630,2934.21 571.72,2934.21 560,2922.5 560,2570 490,2500 210,2500 ; v1(1570,3240) 1630,3300 1860,3300 1875.98,3284.02 1875.98,3195.98 1870,3190 1875.98,3184.02 U5.3@1875.98,3176.18 ; U5.3@1875.98,3174.02 1880,3170 1918.28,3170 1930,3158.28 1930,3064.57 1934.57,3060.01 2100.01,3060.01 2165.43,3125.43 C25.2@2165.43,3180.01 2160,3185.44 2160,3240 2174.75,3254.75 2174.75,3295.84 2181.5,3302.59 2182.28,3301.8 U6.2@2182.28,3298.23 ; v1(1900,900) 1998.5,900 2020,878.5 C24.1@2020,860 2420,860 2495.67,784.33 2517.63,784.33 2520,781.96 2520,780 2528.58,788.58 2535.67,788.58 ; C22.2@1925.43,3060.01 C23.2@1925.43,2960.01 1989.99,2960.01 v1(2050,2900)
  Bottom Layer w20: v1(80,2850) 80,2930 390,3240 v1(1570,3240) ; v1(1900,900) 1900,1231.76 1800,1331.76 1800,1567.84 1855.13,1622.97 1855.13,1647.66 1910.25,1702.79 1952.79,1702.79 2450,2200 2450,2600 2150,2900 v1(2050,2900)
+5V_RS485: C5.2 C9.2 C28.2 IC1.8 R20.2 R21.2 R22.2 R23.2 U6.4 | length 2976.4
  Top Layer w20: IC1.8@1197.28,2365 1195,2365 1190,2360 1298.28,2360 1310,2348.28 C5.2@1309.99,2285.43 1392.12,2285.43 C9.2@1399.99,2293.31 ; R20.2@1330,2620 1335.43,2625.43 R22.2@1431.05,2625.43 ; C9.2@1399.99,2285.43 C9.2@1399.99,2293.31 ; U6.4@2382.28,3298.23 2388.23,3298.23 2374.75,3284.75 2374.75,3189.32 C28.2@2365.43,3180.01 2365.43,2985.43 2200,2820 2200,2630 2120,2550 1930,2550 1836.63,2643.37 1836.63,2763.37 1800,2800 1580,2800 1510.01,2730.01 R21.2@1410.87,2730.01 1410.87,2680.87 1425.74,2666 1425.74,2630.74 R22.2@1431.05,2625.43 ; C9.2@1399.99,2293.31 1399.99,2398.28 1421.72,2420 1442.62,2420 1467.48,2444.87 1598.28,2444.87 1610,2456.58 1610,2610 1594.57,2625.43 1535.45,2625.43 R22.2@1431.05,2625.43
  Top Layer w30: R20.2@1326.65,2625.43 1330,2622.08 R20.2@1330,2620
CF1: J4.11 LED4.1 U4.25 | length 1710.2
  Top Layer w10: v1(800,1630) J4.11@800,1750.02 ; U4.25@1994.18,1911.06 1992.15,1909.03 1992.15,1907.85 2010,1890 2060,1890 v1(2080,1910) 2080,1955.44 LED4.1@2094.57,1970.01
  Bottom Layer w10: v1(800,1630) 822.81,1607.19 1314.1,1607.19 1541.72,1834.81 1729.72,1834.81 1731.75,1836.84 1752.31,1836.84 1754.33,1834.81 1769.9,1834.81 1794.28,1859.19 2029.19,1859.19 v1(2080,1910)
CF2: J4.9 LED3.1 U4.26 | length 1575.2
  Top Layer w10: v1(890,1650) 890,1740.02 J4.9@900,1750.02 ; U4.26@1980.26,1924.98 2022.67,1967.39 2027.39,1967.39 v1(2030,1970) ; v1@2030,1972.03 2047.94,1989.97 2047.94,2023.38 2057.24,2032.68 2066.31,2032.68 2074.57,2040.93 LED3.1@2074.57,2050.01
  Bottom Layer w10: v1(890,1650) 892.61,1647.39 892.61,1637.03 904.44,1625.19 1306.64,1625.19 1534.27,1852.81 1722.27,1852.81 1724.3,1854.84 1759.76,1854.84 1761.79,1852.81 1762.44,1852.81 1786.82,1877.19 1937.19,1877.19 v1(2030,1970)
CF3: J4.7 LED2.1 U4.27 | length 1687
  Top Layer w10: v1(1000,1650) J4.7@1000,1750.02 ; U4.27@1966.34,1938.9 2005.19,1977.75 2005.19,1980.28 2029.94,2005.03 2029.94,2044.51 2030,2044.57 v1(2030,2120) ; v1@2031.9,2121.55 2031.9,2144.63 2032.06,2144.78 2032.06,2160.24 2045.86,2174.05 2058.61,2174.05 LED2.1@2074.57,2190.01
  Bottom Layer w10: v1(1000,1650) 1002.61,1647.39 1012.24,1647.39 1012.44,1647.19 1303.19,1647.19 1526.81,1870.81 1714.81,1870.81 1716.84,1872.84 1757.02,1872.84 1779.37,1895.19 1905.73,1895.19 2030,2019.46 v1(2030,2120)
CF4: J4.5 LED1.1 U4.28 | length 1569.3
  Top Layer w10: J4.5@1100,1750.02 1100,1702.15 1110,1692.15 v1(1110,1690) ; v1(1810,1920) 1919.6,1920 1939.6,1940 1940,1940 1940,1940.4 1987.19,1987.59 1987.19,1987.73 2010,2010.54 2010,2048.19 2005.19,2053 v1(2005.19,2080) 2007.59,2082.41 2007.39,2082.61 2007.39,2107.52 1995.43,2119.48 LED1.1@1995.43,2169.99
  Bottom Layer w10: v1(1110,1690) 1295.09,1690 1579.9,1974.81 1739.36,1974.81 1779.36,2014.81 1880,2014.81 1889.63,2005.19 1990.28,2005.19 2005.19,2020.1 v1(2005.19,2080)